# Altium PCB DiPho_AFE.PcbDoc (part 1 of 2)
Units mm, origin at the board's own origin, x right, y up, seen from the top; angles counter-clockwise.
Board outline 25.2 x 25.2 mm, 4 copper layers (Top Layer, Inner Layer 1, Inner Layer 2, Bottom Layer), stack 1.51 mm thick; 49 components, 32 nets, 163 pads, 94 vias.
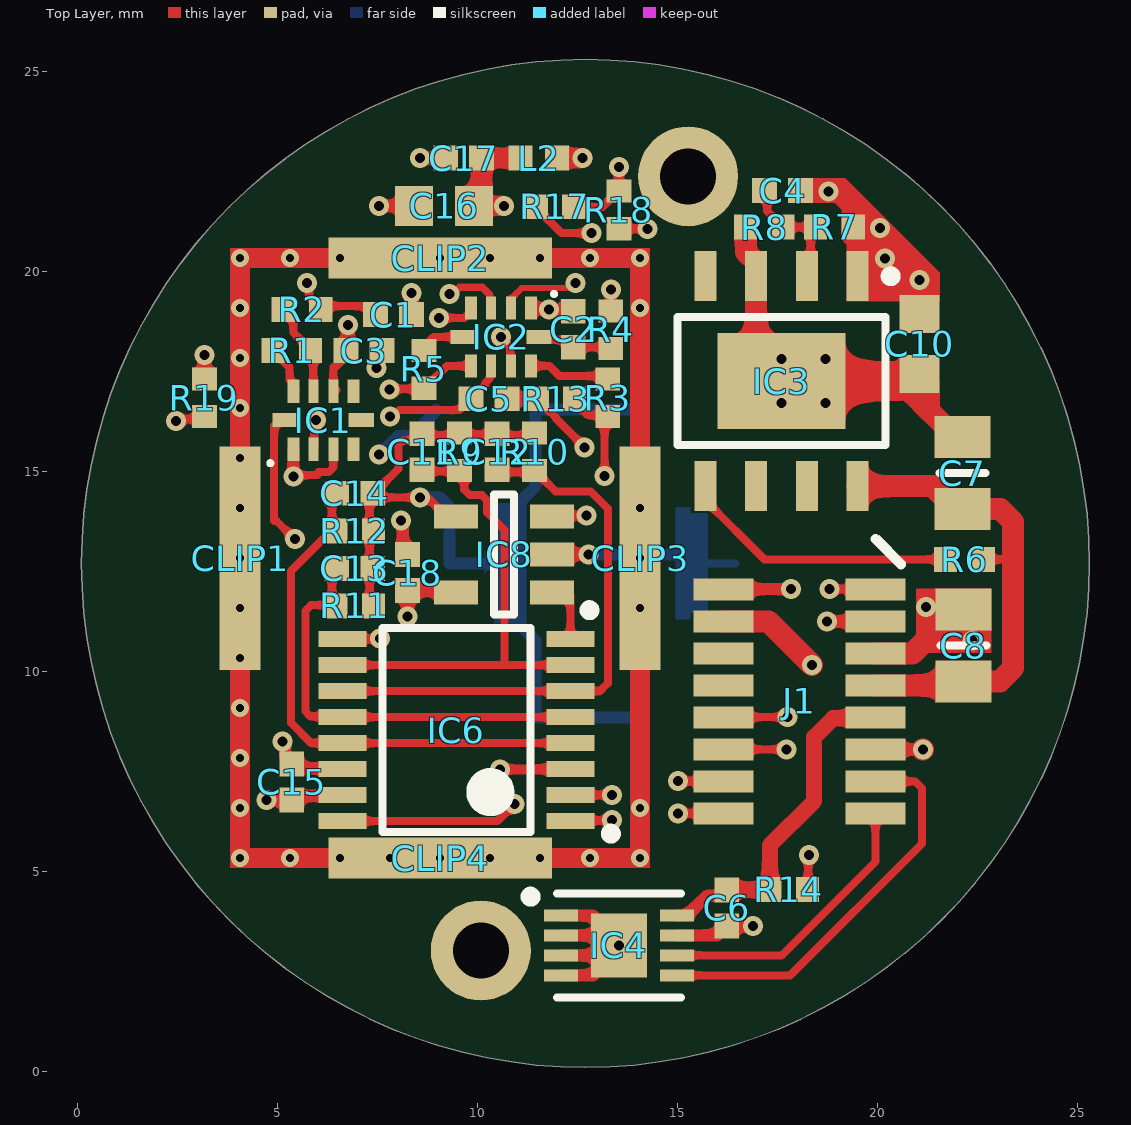
[diagram p0: Top Layer view]
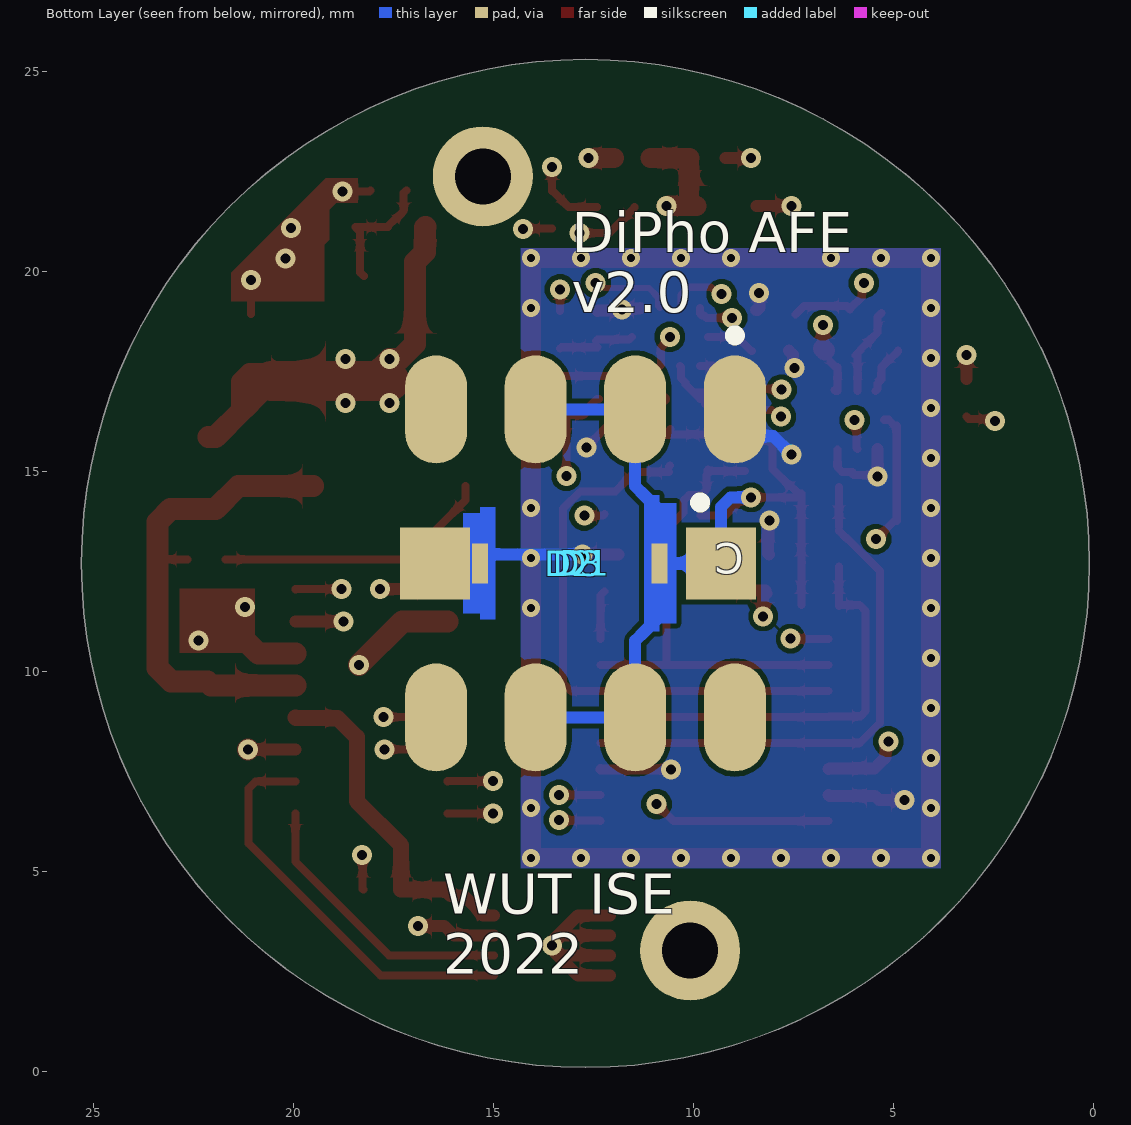
[diagram p1: Bottom Layer view, seen from below]
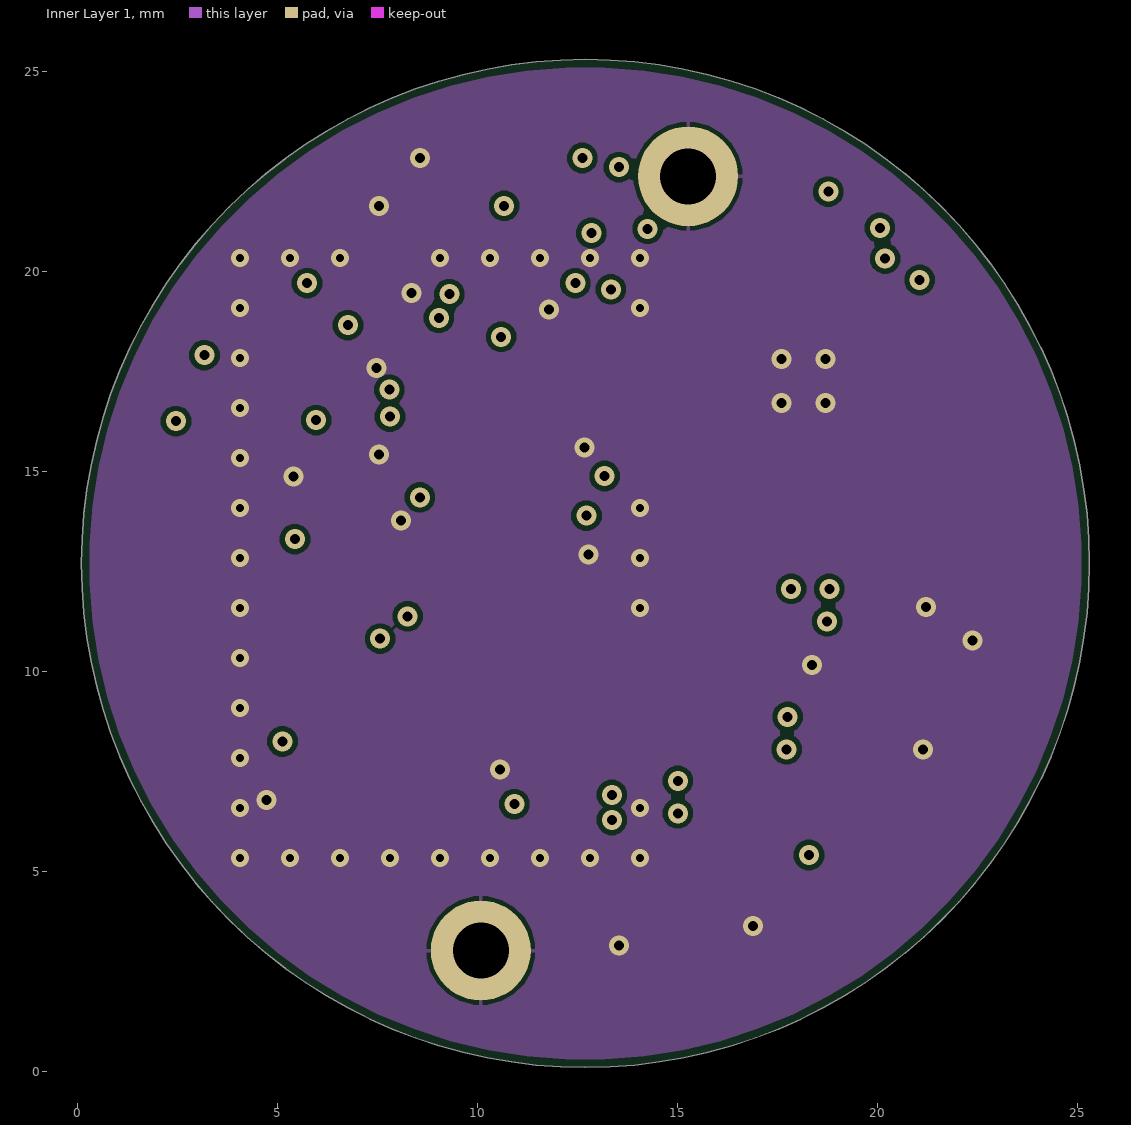
[diagram p2: Inner Layer 1]
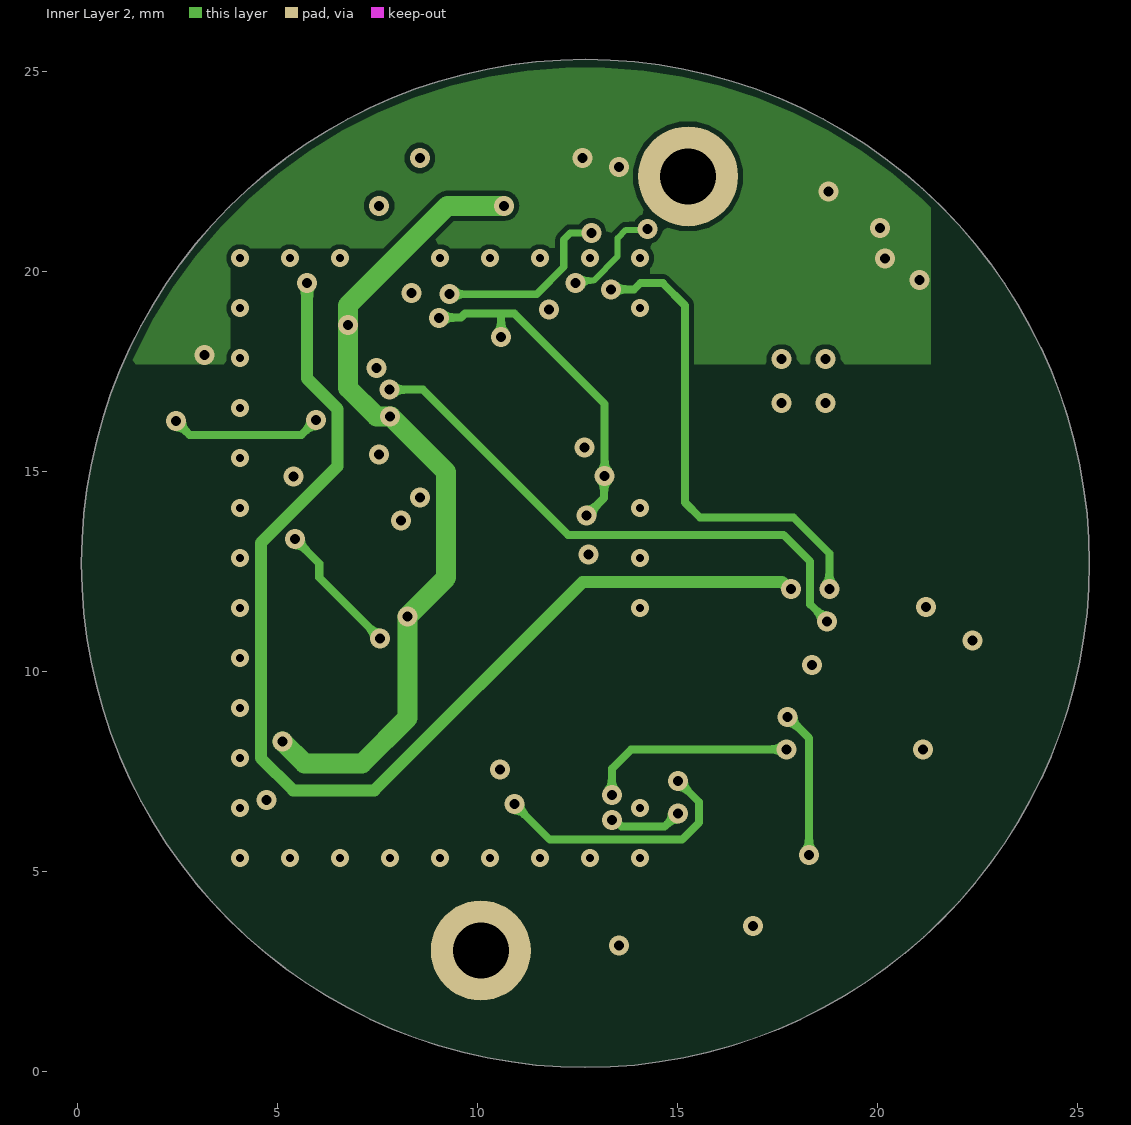
[diagram p3: Inner Layer 2]
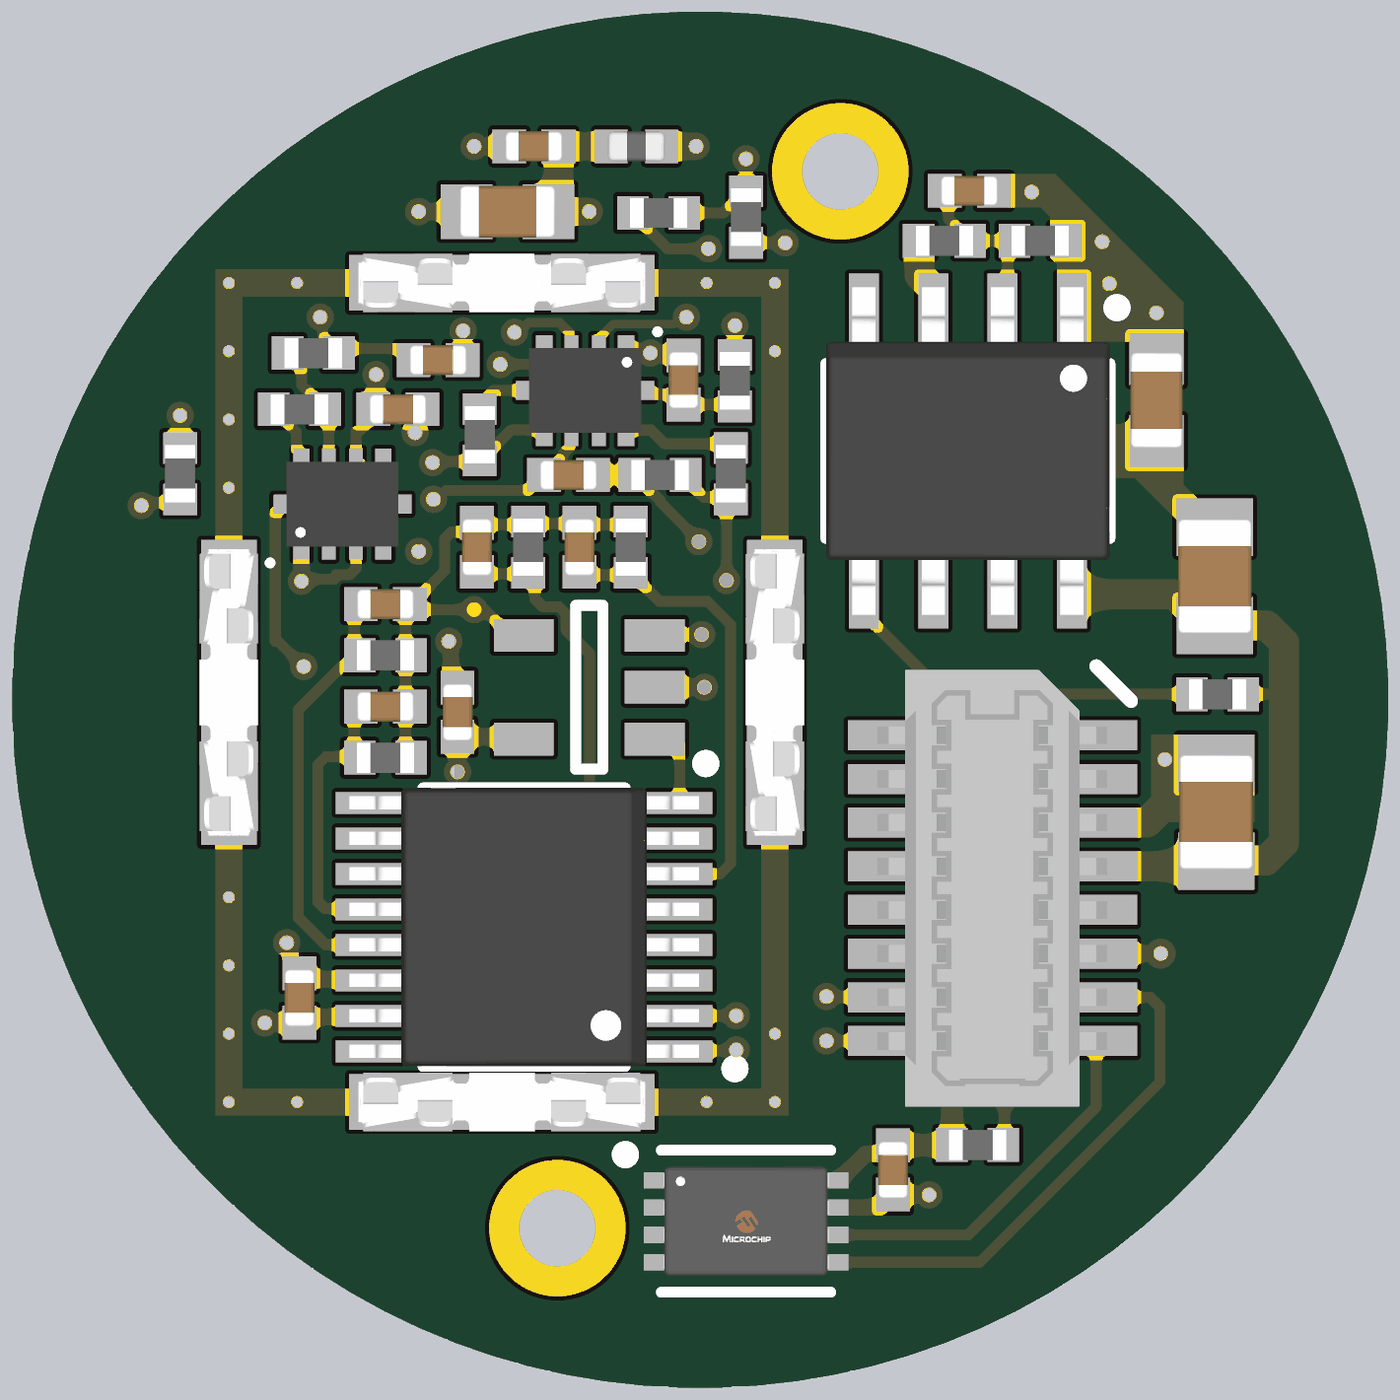
[diagram p4: 3D render of the assembled board from above, using the file's embedded part models]
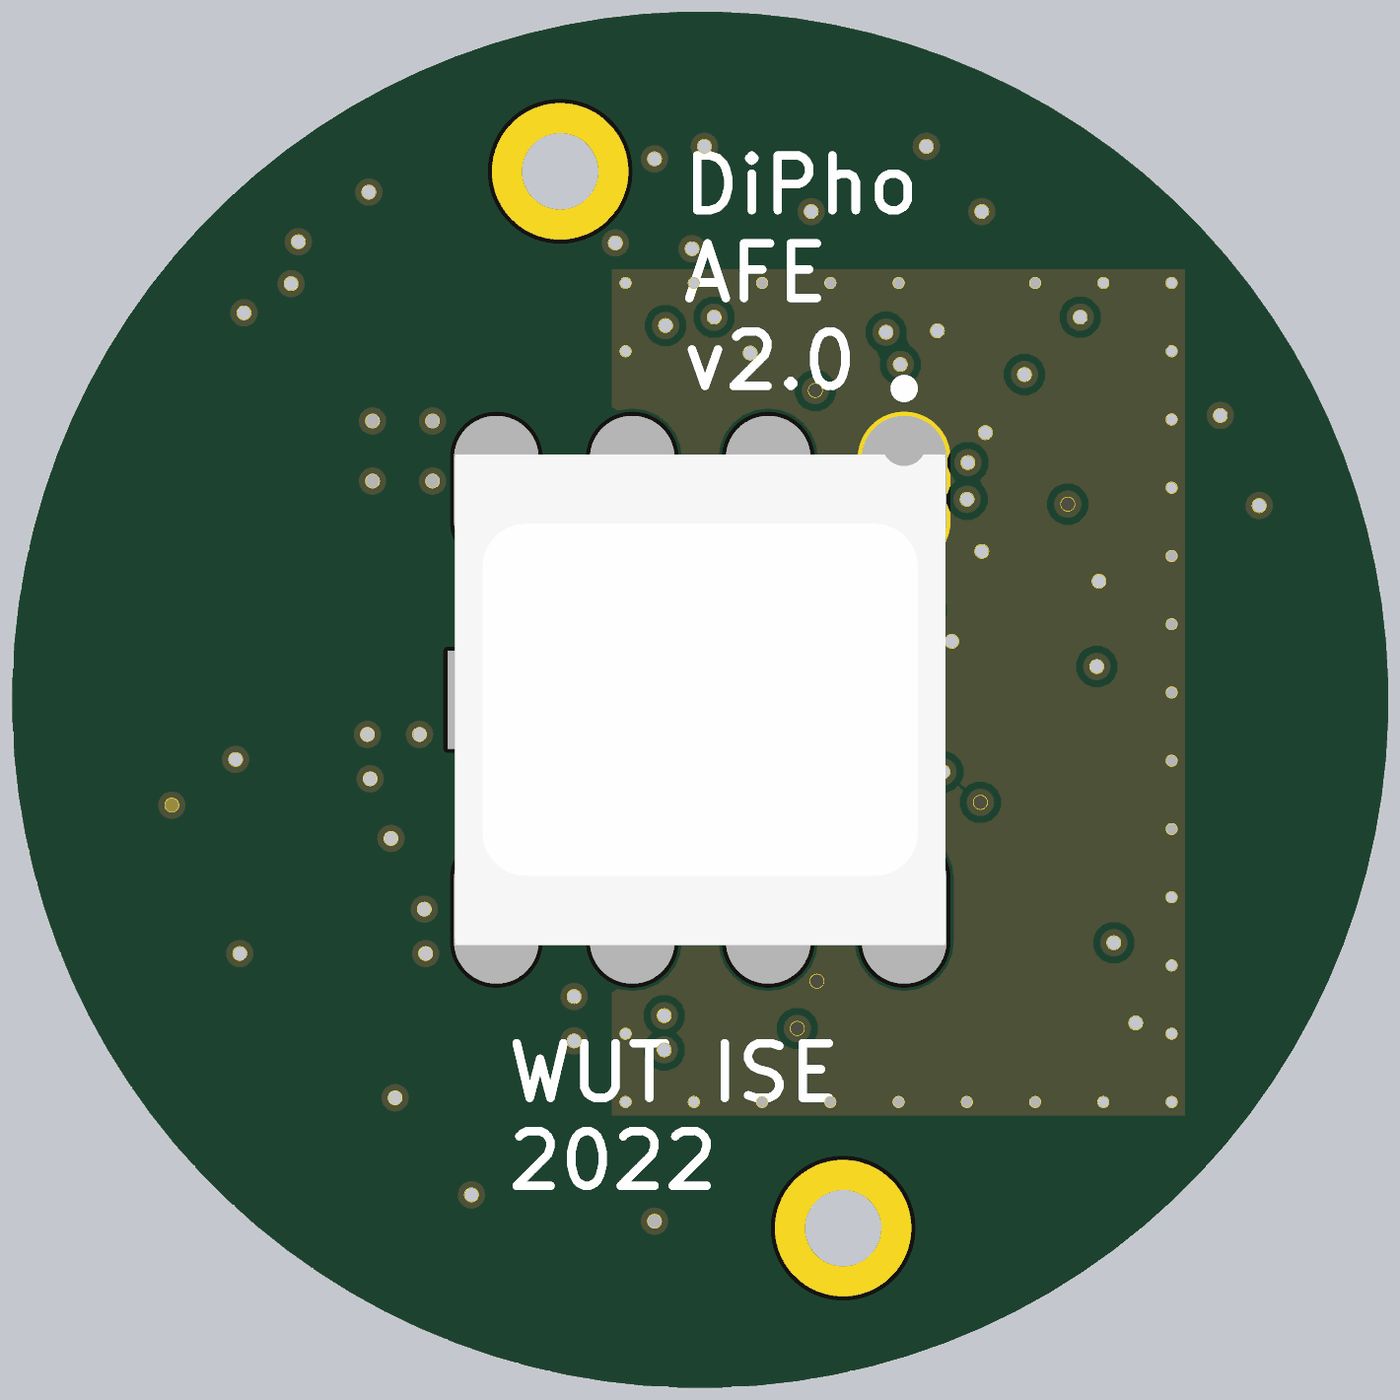
[diagram p5: 3D render of the assembled board from below, using the file's embedded part models]

## Layer stack, top to bottom
Top Solder: solder mask 0.0127, Solder Resist, Dk 3.8
Top Layer: signal copper 0.035
Dielectric 1: prepreg 0.22, PP-006, Dk 4.1
Inner Layer 1: signal copper 0.035
Dielectric: core 0.93, FR-4, Dk 4.5
Inner Layer 2: signal copper 0.035
Dielectric 2: prepreg 0.22, PP-006, Dk 4.1
Bottom Layer: signal copper 0.035
Bottom Solder: solder mask 0.0127, Solder Resist, Dk 3.8

## Board outline
12.7,0.1 cw(c12.7,12.7) 0.1,12.7 cw(c12.7,12.7) 12.7,25.3 cw(c12.7,12.7) 25.3,12.7 cw(c12.7,12.7)

## Design rules (kind name [scope] priority, off if disabled: settings)
AcuteAngle [All] p1: minimum=6.00000000000000E+0001 checktracksonly=FALSE
BoardOutlineClearance [All] p1: gap=0.2 ignorepadtopadclearanceinfootprint=FALSE
Clearance Clearance_ViaInPadThermal [IsPad and (InNet('NetC6_1') or InNet('GND') ) vs IsVia] p1: gap=0 ignorepadtopadclearanceinfootprint=TRUE except(-1: SMDPad-Via THPad-Via)
Clearance Clearance_ViaInPad [IsPad vs IsVia] p2: gap=0 ignorepadtopadclearanceinfootprint=TRUE except(0.001: SMDPad-Via THPad-Via)
Clearance [All] p3: gap=0.127 ignorepadtopadclearanceinfootprint=FALSE except(0.25: Arc-Hole Track-Hole SMDPad-Hole THPad-Hole Via-Hole Fill-Hole Poly-Hole Region-Hole Text-Hole)
ComponentClearance ComponentClearancePD [InComponent('D1') vs InComponent('D2')] p1: gap=-100 collisioncheckmode=3 verticalgap=-100 showdistances=FALSE
ComponentClearance [All] p2: gap=0.102 collisioncheckmode=3 verticalgap=0.102 showdistances=TRUE
DiffPairsRouting [All] p1: maxlimit=0.102 minlimit=0.102 mostfreqgap=0.102 toplayer_minwidth=0.102 toplayer_maxwidth=1816.048 toplayer_prefwidth=0.102 midlayer1_minwidth=0.102 midlayer1_maxwidth=1816.048 midlayer1_prefwidth=0.102 midlayer2_minwidth=0.102 midlayer2_maxwidth=1816.048 midlayer2_prefwidth=0.102 bottomlayer_minwidth=0.102 bottomlayer_maxwidth=1816.048 bottomlayer_prefwidth=0.102 maxuncoupledlength=12.7
Height [All] p1: minheight=0 maxheight=1816.048 prefheight=12.7
HoleSize [All] p1: absolutevalues=TRUE maxlimit=6.3 minlimit=0.2 maxpercent=80.000 minpercent=20.000
HoleToHoleClearance [All] p1: gap=0.25 allowstackedmicrovias=FALSE
MinimumAnnularRing [All] p1: minimumring=0.076
MinimumSolderMaskSliver [All] p1: minsoldermaskwidth=0
PlaneClearance [All] p1: clearance=0.102
PlaneConnect PlaneConnectPowerPads [InPadClass('PowerPads')] p1: planeconnectstyle=Direct reliefexpansion=0.508 reliefentries=4 reliefconductorwidth=0.254 reliefairgap=0.254
PlaneConnect [All] p2: pad.planeconnectstyle=Relief pad.reliefexpansion=0.3 pad.reliefentries=4 pad.reliefconductorwidth=0.102 pad.reliefairgap=0.102 via.planeconnectstyle=Direct via.reliefexpansion=0.3 via.reliefentries=4 via.reliefconductorwidth=0.127 via.reliefairgap=0.127
PolygonConnect PolygonConnectPowerPads [All vs (InPadClass('PowerPads'))] p1: connectstyle=Direct reliefconductorwidth=0.254 reliefentries=4 polygonreliefangle="90 Angle" airgapwidth=0.254
PolygonConnect [All] p2: thpad.connectstyle=Relief thpad.reliefconductorwidth=0.102 thpad.reliefentries=4 thpad.polygonreliefangle="90 Angle" thpad.airgapwidth=0.102 smdpad.connectstyle=Direct smdpad.reliefconductorwidth=0.102 smdpad.reliefentries=4 smdpad.polygonreliefangle="90 Angle" smdpad.airgapwidth=0.102 via.connectstyle=Direct via.reliefconductorwidth=0.127 via.reliefentries=4 via.polygonreliefangle="90 Angle" via.airgapwidth=0.127
RoutingVias [All] p1: holewidth=0.25 width=0.5 viastyle="Through Hole" minholewidth=0.25 minwidth=0.5 maxholewidth=6.3 maxwidth=6.55
SilkToSilkClearance [All] p1: silktosilkclearance=0
SilkToSolderMaskClearance [IsPad] p1: minsilkscreentomaskgap=0.001 clearancetoexposedcopper=TRUE
SolderMaskExpansion SolderMaskExpansionVia [IsVia] p1: expansion=0.075 istentingtop=TRUE
SolderMaskExpansion [All] p2: expansion=0.075 istentingtop=FALSE
Width [All] p1: maxlimit=1816.048 minlimit=0.13 preferedwidth=0.2 midlayer1_minwidth=0.15 midlayer2_minwidth=0.15 bottomlayer_minwidth=0.15 minimp=50.000000 maximp=50.000000 favimp=50.000000
20 further rules are at their usual default settings.

## Classes and differential pairs
component class "B2B Connector": J1 R14
component class "TI Amplifier": C11 C12 C13 C14 C15 C16 C17 C18 CLIP1 CLIP2 CLIP3 CLIP4 IC6 IC8 L2 R9 R10 R11 R12 R13
component class DiPho_AFE: C1 C2 C3 C4 C5 C6 C7 C8 C10 D1 D2 D3 IC1 IC2 IC3 IC4 R1 R2 R3 R4 R5 R6 R7 R8 R17 R18 R19

## Components (designator, comment, footprint, x,y, rotation, side; value= is the part's Value field where it differs from the comment)
C1 "10nF" CAPC1005X55N 7.899,18.923 r180 top
C2 "680nF" CAPC1005X55N 12.395,18.555 r270 top
C3 "100nF" CAPC1005X55N 7.163,18.022 r180 top
C4 "1nF" CAPC1005X55N 17.628,22.022 r0 top
C5 "100nF" CAPC1005X55N 10.287,16.815 r180 top
C6 "100nF" CAPC1005X55N 16.231,4.089 r90 top
C7 "10uF" CAPC2012X135N 22.123,14.961 r270 top
C8 "10uF" CAPC2012X135N 22.149,10.643 r270 top
C10 "4.7uF" CAPC1709X95N 21.057,18.186 r90 top
C11 "47nF" CAPC1005X55N 8.611,15.494 r270 top
C12 "4.7nF" CAPC1005X55N 10.49,15.494 r270 top
C13 "470pF" CAPC1005X55N 6.934,12.576 r180 top
C14 "47pF" CAPC1005X55N 6.934,14.453 r180 top
C15 "100nF" CAPC1005X55N 5.359,7.239 r90 top
C16 "4.7uF" CAPC1709X95N 9.169,21.641 r0 top
C17 "100nF" CAPC1005X55N 9.652,22.835 r0 top
C18 "100nF" CAPC1005X55N 8.255,12.471 r270 top
CLIP1 "Clip 1 Pin" MSBOX_HARWIN_S1721-46 4.067,12.833 r90 top
CLIP2 "Clip 1 Pin" MSBOX_HARWIN_S1721-46 9.067,20.333 r180 top
CLIP3 "Clip 1 Pin" MSBOX_HARWIN_S1721-46 14.067,12.833 r90 top
CLIP4 "Clip 1 Pin" MSBOX_HARWIN_S1721-46 9.067,5.333 r0 top
D1 "OPR5913" LCCS249P899X899X167-8N 12.7,12.7 r270 bottom locked
D2 "SFH2201" SFH_2201 13.09,12.7 r0 bottom locked
D3 "VBPW34S" SOT0P705X130-2M 12.88,12.7 r180 bottom locked
IC1 "TLV9002SIRUGR" QFN50P150X200X40-10N 6.147,16.281 r90 top
IC2 "TLV9002SIRUGR" QFN50P150X200X40-10N 10.592,18.364 r270 top
IC3 "BD00HC5WEFJ-E2" TSOP127P600X100_HS-9L 17.602,17.255 r270 top
IC4 "AT24MAC402-MAHM-T" FP-C04-21355-Q4B-MFG 13.538,3.15 r0 top
IC6 "MAX4639EUE+T" TSOP65P640X110-16L 9.473,8.534 r180 top
IC8 "AD8541ARTZ-REEL7" ADI-RJ-5_N 10.668,12.929 r180 top
J1 "52465-1671" 524651671 18.05,9.25 r0 top locked
L2 "600R@100MHz" INDC1005X55N 11.532,22.835 r180 top
R1 "10k" RESC1005X35N 5.359,18.022 r0 top
R2 "470" RESC1005X40N 5.613,19.05 r0 top
R3 "10k" RESC1005X35N 13.259,16.84 r270 top
R4 "470" RESC1005X40N 13.335,18.542 r270 top
R5 "1k" RESC1005X40N 8.661,17.551 r270 top
R6 "10k" RESC1005X40N 22.174,12.802 r180 top
R7 "10k2" RESC1005X40N 18.923,21.107 r0 top
R8 "2k2" RESC1005X40N 17.17,21.107 r180 top
R9 "324" RESC1005X40N 9.55,15.494 r270 top
R10 "3k24" RESC1005X40N 11.43,15.494 r270 top
R11 "32k4" RESC1005X40N 6.934,11.638 r180 top
R12 "324k" RESC1005X40N 6.934,13.515 r180 top
R13 "0" RESC1005X40N 11.963,16.815 r0 top
R14 "10k" RESC1005X40N 17.78,4.547 r180 top
R17 "10k" RESC1005X35N 11.938,21.615 r0 top
R18 "10k" RESC1005X35N 13.538,21.539 r90 top
R19 "10k" RESC1005X35N 3.175,16.84 r90 top

## Footprints (in the part's own frame and the unit in brackets; to place one, negate y for a bottom-side part, rotate by r counter-clockwise, add the part's x,y. Pads: shape width x height; smd on the part's side, far side on the other; paste and mask are expansions set on the pad)
524651671 [mm] "Molex Slim Stack, 0.80mm pitch, 20ckt"
  rect 1.5x0.55 smd: 1(-1.9,2.8) 2(-1.9,2) 3(-1.9,1.2) 4(-1.9,0.4) 5(-1.9,-0.4) 6(-1.9,-1.2) 7(-1.9,-2) 8(-1.9,-2.8) 9(1.9,-2.8) 10(1.9,-2) 11(1.9,-1.2) 12(1.9,-0.4) 13(1.9,0.4) 14(1.9,1.2) 15(1.9,2) 16(1.9,2.8)
  silkscreen extent 1.91,3.43 2.54,4.06, body extent -2.1,-4 2.1,4, height 3.56
ADI-RJ-5_N [mm] "SOT-23, 5-Leads, Body 2.9x1.6mm, Pitch 0.95mm, IPC Medium Density"
  rect 1.1x0.6 smd: 1(-1.2,0.95) 2(-1.2,0) 3(-1.2,-0.95) 4(1.2,-0.95) 5(1.2,0.95)
  silkscreen extent -2.26,-1.5 0.25,1.52, body extent -0.85,-1.5 0.85,1.5, height 1.45
CAPC1005X55N [mm] "Capacitor, Non-Polarized, Chip; 1.00mm L X 0.50mm W X 0.70mm H, IPC Medium Density"
  rect 0.62x0.62 smd: 1(-0.45,0) 2(0.45,0)
  body extent -0.52,-0.27 0.53,0.28, height 0.55
CAPC1709X95N [mm] "Capacitor, non-Polarized, Chip; 1.65mm L X 0.85mm W X 0.95mm H,IPC Medium Density"
  rect 0.95x1 smd: 1(-0.75,0) 2(0.75,0)
  body extent -0.87,-0.47 0.88,0.48, height 0.95
CAPC2012X135N [mm] "Chip Capacitor, Body 2.0x1.25mm, IPC Medium Density"
  rect 1.05x1.4 smd: 1(-0.9,0) 2(0.9,0)
  silkscreen extent 0,-0.58 0,0.58, body extent -1.05,-0.67 1.05,0.68, height 1.25
FP-C04-21355-Q4B-MFG [mm]
  rect 0.85x0.3 smd paste+0 mask+0: 1(-1.45,0.75) 2(-1.45,0.25) 3(-1.45,-0.25) 4(-1.45,-0.75) 5(1.45,-0.75) 6(1.45,-0.25) 7(1.45,0.25) 8(1.45,0.75)
  rect 1.4x1.6 smd paste+0 mask+0: 9(0,0)
  silkscreen extent -2.33,-1.3 1.55,1.34, body extent -1.97,-1.15 1.97,1.15, height 0.25
INDC1005X55N [mm] "Chip Inductor, 2-Leads, EIA 0402, Metric 1005, Body 1x0.5mm, 0402IPC Medium Density"
  rect 0.6x0.62 smd: 1(-0.46,0) 2(0.46,0)
  body extent -0.52,-0.27 0.53,0.28, height 0.55
LCCS249P899X899X167-8N [mm] "LCC, 8-Pins, Body 8,99x8,99mmx1,67mm, Pitch 2,49mm, IPC Medium Density"
  oval 2.7x1.55 smd: 1(-3.85,3.735) 2(-3.85,1.245) 3(-3.85,-1.245) 4(-3.85,-3.735) 5(3.85,-3.735) 6(3.85,-1.245) 7(3.85,1.245) 8(3.85,3.735)
  silkscreen extent -5.82,3.61 -5.58,3.86, body extent -4.5,-4.5 4.5,4.5, height 1.57
MSBOX_HARWIN_S1721-46 [mm] "RFI Shield Clip, Mini Size (5.08mm Long, 2.23mm High), For 0.13-0.23mm Shield Thickness."
  rect 5.59x1.02 smd: 1(0,0)
  body extent -2.62,-0.54 2.63,0.54, height 2.23
QFN50P150X200X40-10N [mm] "QFN, 10-Leads, Body 1,50x2,00mm, Pitch 0,50mm, IPC Medium Density"
  rect 0.58x0.3 smd: 1(-0.725,0.75) 4(-0.725,-0.75) 6(0.725,-0.75) 9(0.725,0.75)
  rect 0.58x0.25 smd: 2(-0.725,0.25) 3(-0.725,-0.25) 7(0.725,-0.25) 8(0.725,0.25)
  rect 0.35x0.63 smd: 5(0,-0.95) 10(0,0.95)
  silkscreen extent -1.12,1.28 -1.03,1.37, body extent -0.78,-1.03 0.78,1.03, height 0.4
RESC1005X35N [mm] "Chip Resistor, EIA 0402, Metric 1005, Body 1.0x0.5mm, IPC Medium Density"
  rect 0.58x0.62 smd: 1(-0.47,0) 2(0.47,0)
  body extent -0.52,-0.27 0.53,0.28, height 0.35
RESC1005X40N [mm] "Chip Resistor, EIA 0402, Metric 1005, Body 1.0x0.5mm, IPC Medium Density"
  rect 0.58x0.62 smd: 1(-0.47,0) 2(0.47,0)
  body extent -0.52,-0.27 0.53,0.28, height 0.4
SFH_2201 [mm]
  rect 0.4x1 smd paste-1 mask+0: A(2.24,0) C(-2.24,0)
  Top Layer region: 2.235,1.25 2.665,1.25 2.665,-1.25 2.235,-1.25 2.235,-1.4 1.865,-1.4 1.865,1.4 2.235,1.4
  Top Layer region: -1.865,-1.7 -2.235,-1.7 -2.235,-1.5 -2.665,-1.5 -2.665,0 -2.665,1.5 -2.235,1.5 -2.235,1.7 -1.865,1.7
  body extent -2.55,-2 2.54,2, height 0.85
SOT0P705X130-2M [mm] "SOT223, 2-Leads, Body 3,90x7,05mm (avg), Pitch 0,00mm, IPC Low Density"
  rect 1.75x1.8 smd: A(-3.575,0) C(3.575,0)
  silkscreen extent 2.92,1.4 3.17,1.65, body extent -3.52,-2 3.52,2, height 1.3
TSOP65P640X110-16L [mm] "TSOP, 16-Leads, Body 5,00x4,40mm, Pitch 0,65mm, IPC High Density"
  rect 1.2x0.4 smd: 1(-2.85,2.275) 2(-2.85,1.625) 3(-2.85,0.975) 4(-2.85,0.325) 5(-2.85,-0.325) 6(-2.85,-0.975) 7(-2.85,-1.625) 8(-2.85,-2.275) 9(2.85,-2.275) 10(2.85,-1.625) 11(2.85,-0.975) 12(2.85,-0.325) 13(2.85,0.325) 14(2.85,0.975) 15(2.85,1.625) 16(2.85,2.275)
  silkscreen extent -3.99,-2.55 1.85,2.72, body extent -3.2,-2.55 3.2,2.55, height 1.1
TSOP127P600X100_HS-9L [mm] "TSOP, 8-Leads, Body 5,00x3,90mm, Pitch 1,27mm, Thermal Pad 3,20x2,40mm, IPC High Density"
  rect 1.25x0.55 smd: 1(-2.625,1.905) 2(-2.625,0.635) 3(-2.625,-0.635) 4(-2.625,-1.905) 5(2.625,-1.905) 6(2.625,-0.635) 7(2.625,0.635) 8(2.625,1.905)
  rect 2.4x3.2 smd: TH(0,0)
  silkscreen extent -2.75,-2.6 1.6,2.86, body extent -3,-2.6 3,2.6, height 1

## Part data
C1: library part CC0402_10NF_16V_10%_X7R, "Non-polarised capacitor", Case=0402, Manufacturer=GENERIC, Manufacturer1 ComponentHeight=0.55mm, Manufacturer1 Example=PHYCOMP, Manufacturer1 Part Number=223878715636, Tolerance=±10%, Voltage=16V, Author="CERN DEM JLC", Component Type=Standard, CreateDate=03.12.2007, HelpURL=\\cern.ch\dfs\Applications\Altium\Datasheets\CC0402_X7R_PHYCOMP.pdf, LatestRevisionDate=03.12.2007, Manufacturer Part Number=CC0402_10NF_16V_10%_X7R, Mounted=Yes, Part Description="SMD Multilayer Chip Ceramic Capacitor", Part Number=CC0402_10NF_16V_10%_X7R, Pin Count=2, Sense=No, SMD=Yes, Socket=No, Status="Not Recommended", TC=X7R
C2: library part CC0402_680NF_10V_10%_X5R, "Non-polarised capacitor", Case=0402, Manufacturer=GENERIC, Manufacturer1 ComponentHeight=0.55mm, Manufacturer1 Example=MURATA, Manufacturer1 Part Number=GRM155R61A684KE15, Tolerance=±10%, Voltage=10V, Author="CERN DEM BC", Component Type=Standard, CreateDate=19.04.2021, HelpURL=\\cern.ch\dfs\Applications\Altium\Datasheets\CC0402_X5R_MURATA_GRM.pdf, LatestRevisionDate=19.04.2021, Manufacturer Part Number=CC0402_680NF_10V_10%_X5R, Mounted=Yes, Part Description="SMD Multilayer Chip Ceramic Capacitor", Part Number=CC0402_680NF_10V_10%_X5R, Pin Count=2, Sense=No, SMD=Yes, Socket=No, Status=None, TC=X5R
C3 C5 C6 C15 C17 C18: library part CC0402_100NF_16V_10%_X7R, "Non-polarised capacitor", Case=0402, Manufacturer=GENERIC, Manufacturer1 ComponentHeight=0.55mm, Manufacturer1 Example=MURATA, Manufacturer1 Part Number=GRM155R71C104KA88D, Tolerance=±10%, Voltage=16V, Author="CERN DEM JLC", Component Type=Standard, CreateDate=05.12.2013, HelpURL=\\cern.ch\dfs\Applications\Altium\Datasheets\CC0402_X7R_MURATA_GRM.pdf, LatestRevisionDate=03.12.2007, Manufacturer Part Number=CC0402_100NF_16V_10%_X7R, Mounted=Yes, Part Description="SMD Multilayer Chip Ceramic Capacitor", Part Number=CC0402_100NF_16V_10%_X7R, Pin Count=2, Sense=No, SMD=Yes, Socket=No, Status="Not Recommended", TC=X7R
C4: library part CC0402_1NF_50V_10%_X7R, "Non-polarised capacitor", Case=0402, Manufacturer=GENERIC, Manufacturer1 ComponentHeight=0.55mm, Manufacturer1 Example=PHYCOMP, Manufacturer1 Part Number=223858715623, Tolerance=±10%, Voltage=50V, Author="CERN DEM JLC", Component Type=Standard, CreateDate=03.12.2007, HelpURL=\\cern.ch\dfs\Applications\Altium\Datasheets\CC0402_X7R_PHYCOMP.pdf, LatestRevisionDate=03.12.2007, Manufacturer Part Number=CC0402_1NF_50V_10%_X7R, Mounted=Yes, Part Description="SMD Multilayer Chip Ceramic Capacitor", Part Number=CC0402_1NF_50V_10%_X7R, Pin Count=2, Sense=No, SMD=Yes, Socket=No, Status="Not Recommended", TC=X7R
C7 C8: library part CC0805_10UF_10V_10%_X7R, "Non-polarised capacitor", Case=0805, Manufacturer=GENERIC, Manufacturer1 ComponentHeight=1.35mm, Manufacturer1 Example=MURATA, Manufacturer1 Part Number=GRM21BR71A106KE51L, Tolerance=±10%, Voltage=10V, Author="CERN DEM JLC", Component Type=Standard, CreateDate=30.04.2012, HelpURL=\\cern.ch\dfs\Applications\Altium\Datasheets\CC0805_X7R_MURATA.pdf, LatestRevisionDate=30.04.2012, Manufacturer Part Number=CC0805_10UF_10V_10%_X7R, Mounted=Yes, Part Description="SMD Multilayer Chip Ceramic Capacitor", Part Number=CC0805_10UF_10V_10%_X7R, Pin Count=2, Sense=No, SMD=Yes, Socket=No, Status=Preferred, TC=X7R
C10 C16: library part CC0603_4.7UF_16V_10%_X5R, "Non-polarised capacitor", Case=0603, Manufacturer=GENERIC, Manufacturer1 ComponentHeight=0.95mm, Manufacturer1 Example="TAIYO YUDEN", Manufacturer1 Part Number=EMK107ABJ475KA-T, Tolerance=±10%, Voltage=16V, Author="CERN DEM JLC", Component Type=Standard, CreateDate=16.12.2013, HelpURL=\\cern.ch\dfs\Applications\Altium\Datasheets\CC0603_X7R_TAIYO-YUDEN_HIGH-VALUE.pdf, LatestRevisionDate=16.09.2014, Manufacturer Part Number=CC0603_4.7UF_16V_10%_X5R, Mounted=Yes, Part Description="SMD Multilayer Chip Ceramic Capacitor", Part Number=CC0603_4.7UF_16V_10%_X5R, Pin Count=2, Sense=No, SMD=Yes, Socket=No, Status=None, TC=X5R
C11: library part CC0402_47NF_25V_10%_X7R, "Non-polarised capacitor", Case=0402, Manufacturer=GENERIC, Manufacturer1 ComponentHeight=0.55mm, Manufacturer1 Example=TDK, Manufacturer1 Part Number=C1005X7R1E473K050, Tolerance=±10%, Voltage=25V, Author="CERN DEM JLC", Component Type=Standard, CreateDate=25.10.2012, HelpURL=\\cern.ch\dfs\Applications\Altium\Datasheets\CC0402_X7R_TDK_C.pdf, LatestRevisionDate=25.10.2012, Manufacturer Part Number=CC0402_47NF_25V_10%_X7R, Mounted=Yes, Part Description="SMD Multilayer Chip Ceramic Capacitor", Part Number=CC0402_47NF_25V_10%_X7R, Pin Count=2, Sense=No, SMD=Yes, Socket=No, Status=Preferred, TC=X7R
C12: library part CC0402_4.7NF_16V_10%_X7R, "Non-polarised capacitor", Case=0402, Manufacturer=GENERIC, Manufacturer1 ComponentHeight=0.55mm, Manufacturer1 Example=PHYCOMP, Manufacturer1 Part Number=223878715632, Tolerance=±10%, Voltage=16V, Author="CERN DEM JLC", Component Type=Standard, CreateDate=03.12.2007, HelpURL=\\cern.ch\dfs\Applications\Altium\Datasheets\CC0402_X7R_PHYCOMP.pdf, LatestRevisionDate=03.12.2007, Manufacturer Part Number=CC0402_4.7NF_16V_10%_X7R, Mounted=Yes, Part Description="SMD Multilayer Chip Ceramic Capacitor", Part Number=CC0402_4.7NF_16V_10%_X7R, Pin Count=2, Sense=No, SMD=Yes, Socket=No, Status="Not Recommended", TC=X7R
C13: library part CC0402_470PF_50V_10%_X7R, "Non-polarised capacitor", Case=0402, Manufacturer=GENERIC, Manufacturer1 ComponentHeight=0.55mm, Manufacturer1 Example=PHYCOMP, Manufacturer1 Part Number=223858715618, Tolerance=±10%, Voltage=50V, Author="CERN DEM JLC", Component Type=Standard, CreateDate=03.12.2007, HelpURL=\\cern.ch\dfs\Applications\Altium\Datasheets\CC0402_NP0_PHYCOMP.pdf, LatestRevisionDate=03.12.2007, Manufacturer Part Number=CC0402_470PF_50V_10%_X7R, Mounted=Yes, Part Description="SMD Multilayer Chip Ceramic Capacitor", Part Number=CC0402_470PF_50V_10%_X7R, Pin Count=2, Sense=No, SMD=Yes, Socket=No, Status="Not Recommended", TC=X7R
C14: library part CC0402_47PF_50V_5%_C0G, "Non-polarised capacitor", Case=0402, Manufacturer=GENERIC, Manufacturer1 ComponentHeight=0.55mm, Manufacturer1 Example=KEMET, Manufacturer1 Part Number=C0402C470J5GACTU, Tolerance=±5%, Voltage=50V, Author="CERN DEM JLC", Component Type=Standard, CreateDate=03.12.2007, HelpURL="\\cern.ch\dfs\Applications\Altium\Datasheets\CC0402_C0G_KEMET_(Commercial Grade).pdf", LatestRevisionDate=22.04.2015, Manufacturer Part Number=CC0402_47PF_50V_5%_C0G, Mounted=Yes, Part Description="SMD Multilayer Chip Ceramic Capacitor", Part Number=CC0402_47PF_50V_5%_C0G, Pin Count=2, Sense=No, SMD=Yes, Socket=No, Status=Preferred, TC=C0G/NP0
CLIP1 CLIP2 CLIP3 CLIP4: library part MSBOX_HARWIN_S1721-46, "Surface Mount Clip for PCB Screening Covers", Manufacturer=HARWIN, Manufacturer Part Number=S1721-46, Author="CERN DEM MR", Component Type=Standard, ComponentHeight=2.23mm, CreateDate=10.02.2016, HelpURL=\\cern.ch\dfs\Applications\Altium\Datasheets\HARWIN_S1721-46.pdf, LatestRevisionDate=10.02.2016, Mounted=Yes, PackageDescription="RFI Shield Clip, Mini Size (5.08mm Long, 2.23mm High), For 0.13-0.23mm Shield Thickness.", Part Description="RFI Shield Clip, Mini Size (5.08mm Long, 2.23mm High), For 0.13-0.23mm Shield Thickness.", Part Number=MSBOX_HARWIN_S1721-46, Pin Count=1, PressFit=No, Sense=No, SMD=Yes, Socket=No, Status=None
D1: "Surface mount PIN photodiode, SMD-8, RoHS", Case/Package=SMD/SMT, Dark Current=100nA, Manufacturer="TT Optek", Max Operating Temperature=125°C, Max Reverse Voltage (DC)=10V, Min Operating Temperature=-55°C, Package Quantity=25, Supplier Part Number 1=09AK6399, Category="Optical Sensors", ComponentLink1Description=https://datasheet.ciiva.com/2820/opr5910-5913-5915-2820071.pdf?src-supplier=Digi-Key, ComponentLink1URL=https://datasheet.ciiva.com/2820/opr5910-5913-5915-2820071.pdf?src-supplier=Digi-Key, Diode Type=PIN, Manufacturer Part Number=OPR5913, Mount="Surface Mount", Number of Pins=8, Packaging=Tray, Pricing 1="1=17,31000, 10=16,18000, 25=15,70000, 50=14,18000, 100=13,35000, 250=11,75000 (USD)", Responsivity=0.4A/W, Reverse Voltage=10V, RoHS=Yes, RoHS Compliant=Yes, Supplier 1=Newark, Wavelength=880nm
D3: "IR-photodiode Photoelectric current: 45...55 uA Wavelength of max. photosensitivity: 940 nm", Breakdown Voltage=60V, Case/Package=SMD/SMT, Dark Current=2nA, Forward Current=50mA, Forward Voltage=1.3V, Manufacturer=Vishay, Max Operating Temperature=100°C, Max Power Dissipation=215mW, Min Operating Temperature=-40°C, Package Quantity=1, Supplier Part Number 1=1779702, Category=Photodiodes, ComponentLink1Description=https://datasheet.ciiva.com/2819/vbpw34s-2819712.pdf?src-supplier=Digi-Key, ComponentLink1URL=https://datasheet.ciiva.com/2819/vbpw34s-2819712.pdf?src-supplier=Digi-Key, ComponentLink2Description=https://datasheet.ciiva.com/1336/485095-1336336.pdf?src-supplier=Newark, ComponentLink2URL=https://datasheet.ciiva.com/1336/485095-1336336.pdf?src-supplier=Newark, ComponentLink3Description=https://datasheet.ciiva.com/26941/getdatasheetpartid-402658-26941846.pdf?src-supplier=Verical, ComponentLink3URL=https://datasheet.ciiva.com/26941/getdatasheetpartid-402658-26941846.pdf?src-supplier=Verical, ComponentLink4Description=https://datasheet.ciiva.com/4697/vbpw34s-75683-4697656.pdf?src-supplier=Mouser, ComponentLink4URL=https://datasheet.ciiva.com/4697/vbpw34s-75683-4697656.pdf?src-supplier=Mouser, ComponentLink5Description=https://datasheet.ciiva.com/4270/2vbpw34s-4270116.pdf?src-supplier=Arrow+Electronics, ComponentLink5URL=https://datasheet.ciiva.com/4270/2vbpw34s-4270116.pdf?src-supplier=Arrow+Electronics, ComponentLink6Description=https://datasheet.ciiva.com/1249/vbpw34s-1249217.pdf?src-supplier=Element14, ComponentLink6URL=https://datasheet.ciiva.com/1249/vbpw34s-1249217.pdf?src-supplier=Element14, ComponentLink7Description=https://datasheet.ciiva.com/1249/485095-1249011.pdf?src-supplier=Element14, ComponentLink7URL=https://datasheet.ciiva.com/1249/485095-1249011.pdf?src-supplier=Element14, ComponentLink8Description=https://datasheet.ciiva.com/9218/vbpw34s-9218633.pdf?src-supplier=Avnet, ComponentLink8URL=https://datasheet.ciiva.com/9218/vbpw34s-9218633.pdf?src-supplier=Avnet, ComponentLink9Description=https://datasheet.ciiva.com/2819/vbpw34s-2819710.pdf?src-supplier=Digi-Key, ComponentLink9URL=https://datasheet.ciiva.com/2819/vbpw34s-2819710.pdf?src-supplier=Digi-Key, ComponentLink10Description=https://datasheet.ciiva.com/2819/vbpw34s-2819711.pdf?src-supplier=Digi-Key, ComponentLink10URL=https://datasheet.ciiva.com/2819/vbpw34s-2819711.pdf?src-supplier=Digi-Key, ComponentLink11Description=https://datasheet.ciiva.com/46390/1809628-46390726.pdf?src-supplier=Element14, ComponentLink11URL=https://datasheet.ciiva.com/46390/1809628-46390726.pdf?src-supplier=Element14, Contact Plating=Tin, Diode Type=PIN, Fall Time=100ns, Height=1.2mm, Lead Free="Lead Free", Length=4.4mm, Manufacturer Part Number=VBPW34S, Max Reverse Voltage (DC)=60V, Mount="Surface Mount,PCB", Number of Pins=2, Packaging="Tape and Reel", Power Dissipation=215mW, Radiation Hardening=No, REACH SVHC=Unknown, Response Time=100ns, Reverse Breakdown Voltage=60V, Reverse Voltage (DC)=60V, Rise Time=100ns, RoHS=Yes, RoHS Compliant=Yes, Series=-, Supplier 1=Farnell, Viewing Angle=130°, Wavelength=940nm, Width=3.9mm
IC1 IC2: "Rail-to-Rail Input/Output Operational Amplifier Dual 1.8V to 5.5V 10-Pin X2QFN T/R", Manufacturer="Texas Instruments", Supplier Part Number 1=296-TLV9002SIRUGRCT-ND, Category="Amplifiers - Op Amps, Buffer, Instrumentation", Manufacturer Part Number=TLV9002SIRUGR, Pricing 1="1=0,89000, 10=0,78400, 25=0,73600, 100=0,60070, 250=0,55800, 500=0,47488, 1000=0,37990 (USD)", RoHS=Yes, Stock 1=2771, Supplier 1=Digi-Key
IC3: "LDO Regulator Pos 0.8V to 4.5V 1.5A 8-Pin HTSOP-J EP T/R", Dropout Voltage=600mV, Manufacturer=Rohm, Max Input Voltage=8V, Max Operating Temperature=85°C, Max Output Current=1.5A, Max Output Voltage=7V, Max Power Dissipation=2.11W, Min Input Voltage=4.5V, Min Operating Temperature=-25°C, Min Output Voltage=1.5V, Package Quantity=1, Supplier Part Number 1=1780037, Category="Voltage Regulators - Linear", ComponentLink1Description=https://datasheet.ciiva.com/23909/1747247-23909522.pdf?src-supplier=Newark, ComponentLink1URL=https://datasheet.ciiva.com/23909/1747247-23909522.pdf?src-supplier=Newark, ComponentLink2Description=https://datasheet.ciiva.com/2040/bd00hc5wefj-e-2040163.pdf?src-supplier=Digi-Key, ComponentLink2URL=https://datasheet.ciiva.com/2040/bd00hc5wefj-e-2040163.pdf?src-supplier=Digi-Key, ComponentLink3Description=https://datasheet.ciiva.com/13009/bd00hc5wefj-e-210854-13009750.pdf?src-supplier=Mouser, ComponentLink3URL=https://datasheet.ciiva.com/13009/bd00hc5wefj-e-210854-13009750.pdf?src-supplier=Mouser, ComponentLink4Description=https://datasheet.ciiva.com/22732/1747247-22732891.pdf?src-supplier=Element14, ComponentLink4URL=https://datasheet.ciiva.com/22732/1747247-22732891.pdf?src-supplier=Element14, Contact Plating=Copper,Tin, Lead Free="Lead Free", Manufacturer Part Number=BD00HC5WEFJ-E2, Mount="Surface Mount", Number of Outputs=1, Number of Pins=8, Number of Regulators=1, Output Current=1.5A, Output Type=Adjustable, Output Voltage=7V, Packaging="Tape and Reel", REACH SVHC=Unknown, RoHS=Yes, RoHS Compliant=Yes, Series=-, Stock 1=2500, Supplier 1=RSComponents
IC4: library part CMP-06313-000089-1, "IC EEPROM 2K I2C 1MHZ 8UDFN", Frequency=1MHz, Max Operating Temperature=85°C, Min Operating Temperature=-40°C, Access Time=550ns, Memory Size=2Kb, Memory Type=Non-Volatile, Mount="Surface Mount", Packaging="Cut Tape", RoHS Compliant=Yes
IC6: "MAX4639 Series SP4T 2.5V 3.5 Ohm Surface Mount Analog Switch - TSSOP-16", Case/Package=TSSOP, Manufacturer=Maxim, Max Dual Supply Voltage=2.75V, Max Operating Temperature=85°C, Max Power Dissipation=457mW, Max Supply Voltage=5.5V, Min Dual Supply Voltage=900mV, Min Operating Temperature=-40°C, Min Supply Voltage=1.8V, On-State Resistance=3.5R, Operating Supply Current=1uA, Operating Supply Voltage=5V, Package Quantity=2500, Supplier Part Number 1=69AH0947, Bandwidth=85MHz, Category="Interface ICs", ComponentLink1Description=https://datasheet.ciiva.com/12185/max4638-max4639-64806-12185552.pdf?src-supplier=Mouser, ComponentLink1URL=https://datasheet.ciiva.com/12185/max4638-max4639-64806-12185552.pdf?src-supplier=Mouser, ComponentLink2Description=https://datasheet.ciiva.com/2979/max4638-max4639-2979809.pdf?src-supplier=Avnet, ComponentLink2URL=https://datasheet.ciiva.com/2979/max4638-max4639-2979809.pdf?src-supplier=Avnet, ComponentLink3Description=https://datasheet.ciiva.com/1685/max4638-max4639-1685689.pdf?src-supplier=Digi-Key, ComponentLink3URL=https://datasheet.ciiva.com/1685/max4638-max4639-1685689.pdf?src-supplier=Digi-Key, Logic Function=Multiplexer, Manufacturer Part Number=MAX4639EUE+T, Mount="Surface Mount", Number of Channels=2, Number of Pins=16, Number of Switches=2, Packaging="Tape and Reel", Pricing 1="1=6,47000, 10=5,85000, 25=5,58000, 50=5,22000, 100=4,85000, 250=4,63000, 500=4,22000, 1000=4,08000 (USD)", Propagation Delay=18ns, Radiation Hardening=No, RoHS=Yes, RoHS Compliant=Yes, Series=-, Stock 1=5520, Supplier 1=Newark, Supply Type=Single,Dual, Turn-Off Delay Time=9ns, Turn-On Delay Time=20ns
IC8: library part CMP-0384-01498-2, "Single Channel RRIO Operational Amplifier, 1 MHz BW, 920 mV/us SR, Industrial, 5-pin SOT23 (RJ-5), Reel", Amplifiers Per Package=1, Generic Part Number=AD8541, Input Bias Current=4pA, Input Offset Voltage=1mV, Manufacturer="Analog Devices", Code_JEDEC=MO-178-AA, ComponentLink1Description="Manufacturer URL", ComponentLink1URL=http://www.analog.com/en/index.html, ComponentLink2Description=Datasheet, ComponentLink2URL=http://www.analog.com/static/imported-files/data_sheets/AD8541_8542_8544.pdf, ComponentLink3Description="Package Specification", ComponentLink3URL=http://www.analog.com/static/imported-files/packages/PKG_PDF/SOT-23(RJ)/RJ_5.pdf, ComponentLink4Description="Reference Circuit", ComponentLink4URL=http://www.analog.com/en/all-operational-amplifiers-op-amps/operational-amplifiers-op-amps/ad8541/products/product.html#product-recommendations, DatasheetVersion="Rev. G", Iq/Amp=65uA, Mounting Technology="Surface Mount", PackageDescription="5-Pin Small Outline Transistor Package, Body 2.9 x 1.6 mm, Pitch 0.95 mm", PackageReference=RJ-5, PackageVersion=121608-A, PartNumber=AD8541ARTZ-REEL7, RevisionNote="Reference Circuit URL fixed", Slew Rate=920mV/us, Small Signal Bandwidth=1MHz, V Span Max=5.5V, V Span Min=2.7V
J1: "A Connector for Board - Board Connections with A 0.80 mm Pitch. (Molex)", Manufacturer=Molex, Supplier Part Number 1=3500606, Category="Headers and Wire Housings", ComponentLink1Description=https://datasheet.ciiva.com/5130/0524651671-pcb-receptacles-170554-5130522.pdf?src-supplier=Mouser, ComponentLink1URL=https://datasheet.ciiva.com/5130/0524651671-pcb-receptacles-170554-5130522.pdf?src-supplier=Mouser, ComponentLink2Description=https://datasheet.ciiva.com/10078/0524651671-pcb-receptacles-10078959.pdf?src-supplier=Avnet, ComponentLink2URL=https://datasheet.ciiva.com/10078/0524651671-pcb-receptacles-10078959.pdf?src-supplier=Avnet, Manufacturer Part Number=52465-1671, RoHS=Yes, Stock 1=1320, Supplier 1=Farnell
L2: library part IND0402_MURATA_BLM15HD601SN1, Case=0402, Manufacturer=MURATA, Manufacturer Part Number=BLM15HD601SN1D, Power=300mA, Resistance=0.85R, Tolerance=±25%, Author="CERN DEM JLC", Component Type=Standard, ComponentHeight=0.55mm, CreateDate=28.02.2012, HelpURL=\\cern.ch\dfs\Applications\Altium\Datasheets\IND0402_MURATA_BLM15H.pdf, LatestRevisionDate=25.10.2018, Mounted=Yes, Part Description="SMD EMIFIL Suppression Chip Ferrite Bead", Part Number=IND0402_MURATA_BLM15HD601SN1, Pin Count=2, Sense=No, SMD=Yes, Socket=No, Status=None
R1 R3 R17 R18 R19: library part R0402_10K_0.1%_0.063W_25PPM, "Resistor - 0.1%", Case=0402, Manufacturer=GENERIC, Manufacturer1 ComponentHeight=0.35mm, Manufacturer1 Example="TE CONNECTIVITY", Manufacturer1 Part Number=CPF0402B10KE1, Power=0.063W, Tolerance=±0.1%, Author="CERN DEM JMW", Component Type=Standard, CreateDate=22.09.2015, HelpURL=\\cern.ch\dfs\Applications\Altium\Datasheets\R0402_TYCO_CPF.pdf, LatestRevisionDate=22.09.2015, Manufacturer Part Number=R0402_10K_0.1%_0.063W_25PPM, Mounted=Yes, Part Description="Thin Film Precision Resistor", Part Number=R0402_10K_0.1%_0.063W_25PPM, Pin Count=2, PressFit=No, Sense=No, SMD=Yes, Socket=No, Status="Not Recommended", TC=±25ppm/°C
R2 R4: library part R0402_470R_1%_0.0625W_100PPM, "Resistor - 1%", Case=0402, Manufacturer=GENERIC, Manufacturer1 ComponentHeight=0.4mm, Manufacturer1 Example="YAGEO PHYCOMP", Manufacturer1 Part Number=232270674701L, Power=0.0625W, Tolerance=±1%, Author="CERN DEM JLC", Component Type=Standard, CreateDate=03.12.2007, HelpURL=\\cern.ch\dfs\Applications\Altium\Datasheets\R0402_Phycomp_RC0402.pdf, LatestRevisionDate=17.10.2012, Manufacturer Part Number=R0402_470R_1%_0.0625W_100PPM, Mounted=Yes, Part Description="General Purpose Thick Film Chip Resistor", Part Number=R0402_470R_1%_0.0625W_100PPM, Pin Count=2, PressFit=No, Sense=No, SMD=Yes, Socket=No, Status="Not Recommended", TC=±100ppm/°C
R5: library part R0402_1K_1%_0.0625W_100PPM, "Resistor - 1%", Case=0402, Manufacturer=GENERIC, Manufacturer1 ComponentHeight=0.4mm, Manufacturer1 Example="YAGEO PHYCOMP", Manufacturer1 Part Number=232270671002L, Power=0.0625W, Tolerance=±1%, Author="CERN DEM JLC", Component Type=Standard, CreateDate=03.12.2007, HelpURL=\\cern.ch\dfs\Applications\Altium\Datasheets\R0402_Phycomp_RC0402.pdf, LatestRevisionDate=17.10.2012, Manufacturer Part Number=R0402_1K_1%_0.0625W_100PPM, Mounted=Yes, Part Description="General Purpose Thick Film Chip Resistor", Part Number=R0402_1K_1%_0.0625W_100PPM, Pin Count=2, PressFit=No, Sense=No, SMD=Yes, Socket=No, Status="Not Recommended", TC=±100ppm/°C
R6 R14: library part R0402_10K_1%_0.0625W_100PPM, "Resistor - 1%", Case=0402, Manufacturer=GENERIC, Manufacturer1 ComponentHeight=0.4mm, Manufacturer1 Example="YAGEO PHYCOMP", Manufacturer1 Part Number=232270671003L, Power=0.0625W, Tolerance=±1%, Author="CERN DEM JLC", Component Type=Standard, CreateDate=03.12.2007, HelpURL=\\cern.ch\dfs\Applications\Altium\Datasheets\R0402_Phycomp_RC0402.pdf, LatestRevisionDate=17.10.2012, Manufacturer Part Number=R0402_10K_1%_0.0625W_100PPM, Mounted=Yes, Part Description="General Purpose Thick Film Chip Resistor", Part Number=R0402_10K_1%_0.0625W_100PPM, Pin Count=2, PressFit=No, Sense=No, SMD=Yes, Socket=No, Status="Not Recommended", TC=±100ppm/°C
R7: library part R0402_10K_1%_0.0625W_100PPM, "Resistor - 1%", Case=0402, Manufacturer=GENERIC, Manufacturer1 ComponentHeight=0.4mm, Manufacturer Part Number=R0402_10K2_1%_0.0625W_100PPM, Power=0.0625W, Tolerance=±1%, Author="CERN DEM JLC", Component Type=Standard, CreateDate=03.12.2007, HelpURL=\\cern.ch\dfs\Applications\Altium\Datasheets\R0402_Phycomp_RC0402.pdf, LatestRevisionDate=17.10.2012, Mounted=Yes, Part Description="General Purpose Thick Film Chip Resistor", Part Number=R0402_10K2_1%_0.0625W_100PPM, Pin Count=2, PressFit=No, Sense=No, SMD=Yes, Socket=No, Status="Not Recommended", TC=±100ppm/°C
R8: library part R0402_2K2_1%_0.0625W_100PPM, "Resistor - 1%", Case=0402, Manufacturer=GENERIC, Manufacturer1 ComponentHeight=0.4mm, Manufacturer1 Example="YAGEO PHYCOMP", Manufacturer1 Part Number=232270672202L, Power=0.0625W, Tolerance=±1%, Author="CERN DEM JLC", Component Type=Standard, CreateDate=03.12.2007, HelpURL=\\cern.ch\dfs\Applications\Altium\Datasheets\R0402_Phycomp_RC0402.pdf, LatestRevisionDate=17.10.2012, Manufacturer Part Number=R0402_2K2_1%_0.0625W_100PPM, Mounted=Yes, Part Description="General Purpose Thick Film Chip Resistor", Part Number=R0402_2K2_1%_0.0625W_100PPM, Pin Count=2, PressFit=No, Sense=No, SMD=Yes, Socket=No, Status="Not Recommended", TC=±100ppm/°C
R9: library part R0402_324R_1%_0.063W_100PPM, "Resistor - 0.1%", Case=0402, Manufacturer=GENERIC, Manufacturer1 ComponentHeight=0.4mm, Manufacturer Part Number=R0402_324R_0.1%_0.063W_100PPM, Power=0.063W, Tolerance=±0.1%, Author="CERN DEM BC", Component Type=Standard, CreateDate=10.01.2020, HelpURL="\\cern.ch\dfs\Applications\Altium\Datasheets\R0402_VISHAY_CRCW e3.pdf", LatestRevisionDate=10.01.2020, Mounted=Yes, Part Description="General Purpose Thick Film Chip Resistor", Part Number=R0402_324R_0.1%_0.063W_100PPM, Pin Count=2, PressFit=No, Sense=No, SMD=Yes, Socket=No, Status=None, TC=±100ppm/°C
R10: library part R0402_3K3_1%_0.0625W_100PPM, "Resistor - 0.1%", Case=0402, Manufacturer=GENERIC, Manufacturer1 ComponentHeight=0.4mm, Manufacturer Part Number=R0402_3K24_0.1%_0.0625W_100PPM, Power=0.0625W, Tolerance=±0.1%, Author="CERN DEM JLC", Component Type=Standard, CreateDate=03.12.2007, HelpURL=\\cern.ch\dfs\Applications\Altium\Datasheets\R0402_Phycomp_RC0402.pdf, LatestRevisionDate=17.10.2012, Mounted=Yes, Part Description="General Purpose Thick Film Chip Resistor", Part Number=R0402_3K24_0.1%_0.0625W_100PPM, Pin Count=2, PressFit=No, Sense=No, SMD=Yes, Socket=No, TC=±100ppm/°C
R11: library part R0402_33K2_0.1%_0.063W_25PPM, "Resistor - 0.1%", Case=0402, Manufacturer=GENERIC, Manufacturer1 ComponentHeight=0.4mm, Manufacturer Part Number=R0402_32K4_0.1%_0.063W_25PPM, Power=0.063W, Tolerance=±0.1%, Voltage=50V, Author="CERN DEM BC", Component Type=Standard, CreateDate=09.07.2020, HelpURL=\\cern.ch\dfs\Applications\Altium\Datasheets\R0402_PANASONIC_ERA.pdf, LatestRevisionDate=09.07.2020, Mounted=Yes, Part Description="Thin Film Precision Resistor", Part Number=R0402_32K4_0.1%_0.063W_25PPM, Pin Count=2, PressFit=No, Sense=No, SMD=Yes, Socket=No, TC=±25ppm/°C
R12: library part R0402_324K_1%_0.063W_100PPM, "Resistor - 0.1%", Case=0402, Manufacturer=GENERIC, Manufacturer1 ComponentHeight=0.4mm, Manufacturer Part Number=R0402_324K_0.1%_0.063W_100PPM, Power=0.063W, Tolerance=±0.1%, Author="CERN DEM BC", Component Type=Standard, CreateDate=24.01.2020, HelpURL="\\cern.ch\dfs\Applications\Altium\Datasheets\R0402_VISHAY_CRCW e3.pdf", LatestRevisionDate=24.01.2020, Mounted=Yes, Part Description="General Purpose Thick Film Chip Resistor", Part Number=R0402_324K_0.1%_0.063W_100PPM, Pin Count=2, PressFit=No, Sense=No, SMD=Yes, Socket=No, Status=None, TC=±100ppm/°C
R13: library part R0402_0R_JUMPER, "Resistor", Case=0402, Manufacturer=GENERIC, Manufacturer1 ComponentHeight=0.4mm, Manufacturer1 Example="YAGEO PHYCOMP", Manufacturer1 Part Number=232270591001L, Author="CERN DEM JLC", Component Type=Standard, CreateDate=03.12.2007, HelpURL=\\cern.ch\dfs\Applications\Altium\Datasheets\R0402_Phycomp_RC0402.pdf, LatestRevisionDate=17.10.2012, Manufacturer Part Number=R0402_0R_JUMPER, Mounted=Yes, Part Description="1A (0.05R Max DC Resistance) Zero Ohm Jumper", Part Number=R0402_0R_JUMPER, Pin Count=2, PressFit=No, Sense=No, SMD=Yes, Socket=No, Status="Not Recommended"

## Free pads (board coordinates)
  round 2.5 hole 1.4: 2(10.084,3.023) 2(15.265,22.377)

## Via types
v1: diameter 0.5, hole 0.25, Top Layer to Bottom Layer, tented both sides, 61 vias
v2: diameter 0.45, hole 0.2, Top Layer to Bottom Layer, tented both sides, 33 vias

## Nets (pads, with @x,y where several pads share a name; then routed paths per layer and width w, separated by ;. In a path a pad name is that pad's centre, name@x,y a point inside that pad or via, vN(x,y) a via of type N, cw(c..) or ccw(c..) an arc to the next point about the centre after c; other vN are vias at no path point)
AFE_TYPE_IND: J1.5 R14.1 | length 6.2
  Top Layer w0.203: J1.5 16.157,8.857 17.747,8.857 v1(17.755,8.865) ; R14.1 18.269,4.566 18.269,5.391 v1(18.288,5.41)
  Inner Layer 2 w0.203: v1(17.755,8.865) 18.288,8.331 v1(18.288,5.41)
DAC_TIA_OFFSET: C2.2 IC2.10 R4.2 | length 1.9
  Top Layer w0.203: IC2.10 11.611,18.295 12.395,18.295 C2.2@12.428,18.262 ; C2.2 13.302,18.105 R4.2
GND: C1.1 C2.1 C3.1 C5.1 C6.1 C7.1 C8.1 C10.1 C15.1 C16.1 C17.1 C18.1 CLIP1.1 CLIP2.1 CLIP3.1 CLIP4.1 D1.1 D2.A D3.A IC1.1 IC1.3 IC2.1 IC3.3 IC3.TH IC4.1 IC4.2 IC4.3 IC4.4 IC4.7 IC4.9 IC6.3 IC6.15 IC8.2 J1.2 J1.11 J1.14 pad.2 R8.2 R13.1 | length 48.4
  Top Layer w0.2: v1@5.433,14.907 5.947,14.907 ; v1@5.448,14.871 v1@5.484,14.907 ; 5.998,14.907 6.08,14.99 ; 6.029,14.99 6.282,14.99 6.399,15.107 IC1.3@6.399,15.554 ; R13.1 11.493,16.795 11.683,16.605 11.807,16.481 11.834,16.481 11.967,16.348 11.967,16.321 v1@12.675,15.614
  Top Layer w0.254: v1(10.563,7.546) 10.57,7.553 12.316,7.553 IC6.3
  Top Layer w0.3: v1(4.724,6.782) 4.728,6.785 5.356,6.785 5.461,6.89 6.604,6.89 IC6.15 ; v1(5.397,14.871) IC1.1 ; v1(7.477,17.592) 7.515,17.63 7.515,17.924 C3.1 ; v1(7.544,21.641) C16.1 ; v1(8.094,13.771) 8.132,13.733 8.132,12.951 C18.1@8.106,12.925 ; v1(8.357,19.456) 8.353,19.453 8.353,19.083 8.398,19.038 C1.1@8.437,19.038 ; v1(8.56,22.835) C17.1 ; C5.1 R13.1 ; IC2.1 11.342,19.07 11.766,19.07 v1(11.786,19.05) 11.808,19.027 12.373,19.027 C2.1 ; IC8.2 v1(12.776,12.929) ; IC4.4 12.888,2.4 13.538,3.05 v1(13.538,3.15) ; IC4.3 13.288,2.9 v1(13.538,3.15) ; IC4.2 13.288,3.4 v1(13.538,3.15) ; IC4.1 12.888,3.9 13.538,3.25 v1(13.538,3.15) ; IC4.7 15.991,3.4 C6.1 16.234,3.636 16.887,3.636 v1(16.891,3.632) ; J1.11 v1@21.131,8.05
  Top Layer w0.55: J1.2 17.274,11.25 v1(18.364,10.16) ; R8.2 16.715,21.092 16.715,20.482 16.967,20.23 IC3.3 16.967,18.18 17.342,17.805 v1(17.602,17.805) 17.971,17.436 C10.1 21.082,17.436 21.282,17.236 21.282,16.527 ; J1.14 20.877,10.45 21.72,11.293 21.899,11.293 C8.1 ; 20.554,17.255 21.282,16.527 ; v1@21.131,8.05 v1(21.133,8.052) ; C7.1 21.948,15.861 21.282,16.527
  Top Layer w1: IC3.TH 20.554,17.255
  Bottom Layer w0.2: D2.A D3.A
  Bottom Layer w0.3: v1(7.544,15.418) 8.007,15.881 8.341,15.881 8.965,16.505 D1.1 ; v1(12.776,12.929) 15.28,12.929 15.33,12.879 D2.A
  other v1: 22.377,10.77 21.209,11.608 12.675,15.596 17.602,16.705 18.702,16.705 18.702,17.805
  other v2: 4.067,5.333 5.317,5.333 6.567,5.333 7.817,5.333 9.067,5.333 10.317,5.333 11.567,5.333 12.817,5.333 14.067,5.333 4.067,6.583 14.067,6.583 4.067,7.833 4.067,9.083 4.067,10.333 4.067,11.583 14.067,11.583 4.067,12.833 14.067,12.833 4.067,14.083 14.067,14.083 4.067,15.333 4.067,16.583 4.067,17.833 4.067,19.083 14.067,19.083 4.067,20.333 5.317,20.333 6.567,20.333 9.067,20.333 10.317,20.333 11.567,20.333 12.817,20.333 14.067,20.333
LDO_FB: C4.1 IC3.2 R7.1 R8.1 | length 3.2
  Top Layer w0.2: C4.1 17.244,21.956 17.244,21.505 17.432,21.317 17.45,21.317 17.64,21.127 R8.1@17.64,21.109 ; R8.1 R7.1 18.331,20.986 18.331,19.975 IC3.2
NetC11_2: C11.2 IC6.7 IC6.10 R9.2 | length 12.2
  Top Layer w0.2: IC6.10 10.675,10.159 ; C11.2@8.712,15.006 R9.2@9.632,15.006 ; R9.2 9.668,14.906 9.668,14.551 9.814,14.406 10.112,14.406 10.245,14.273 10.245,13.975 10.675,13.544 10.675,10.159 ; R9.2@9.632,15.044 R9.2@9.652,15.024 ; IC6.7 10.675,10.159
NetC12_2: C12.2 IC6.6 IC6.11 R10.2 | length 14.2
  Top Layer w0.2: IC6.11 IC6.6 13.065,9.509 13.259,9.703 13.259,14.072 12.827,14.503 11.951,14.503 11.556,14.898 11.5,14.954 R10.2 ; C12.2@10.592,15.143 C12.2@10.612,15.123 ; C12.2@10.612,14.986 R10.2@11.43,14.986
NetC13_2: C13.2 IC6.5 IC6.12 R11.2 | length 10.9
  Top Layer w0.2: R11.2@6.363,11.64 C13.2@6.363,12.629 ; R11.2@6.363,11.66 5.844,11.66 5.696,11.513 5.696,9.006 5.826,8.876 6.607,8.876 IC6.12 IC6.5
NetC14_2: C14.2 IC6.4 IC6.13 R12.2 | length 13.4
  Top Layer w0.2: R12.2@6.363,13.536 6.363,13.516 6.173,13.326 6.153,13.326 5.336,12.51 5.336,8.715 5.84,8.211 6.622,8.211 IC6.13 IC6.4 ; R12.2@6.363,13.618 C14.2@6.363,14.607
NetIC1_2: IC1.2 R19.1 | length 5.3
  Top Layer w0.2: v1(2.464,16.256) 2.521,16.313 3.118,16.313 R19.1 ; IC1.2@5.9,15.56 5.922,15.581 5.922,16.234 v1(5.969,16.281)
  Inner Layer 2 w0.2: v1(2.464,16.256) 2.804,15.916 5.604,15.916 v1(5.969,16.281)
NetIC1_8: IC1.8 R1.2 R2.1 | length 2.2
  Top Layer w0.2: R2.1@5.296,18.961 5.4,18.858 5.4,18.469 5.637,18.232 5.639,18.232 5.829,18.042 R1.2 R1.2@5.948,17.903 ; IC1.8 R1.2@5.897,17.903
NetIC1_9: IC1.9 R1.1 | length 1.3
  Top Layer w0.2: R1.1 4.889,18.002 5.079,17.812 5.099,17.812 5.301,17.61 5.301,17.293 5.398,17.196 5.398,17.056 IC1.9@5.448,17.006
NetIC2_2: IC2.2 R18.1 | length 5.4
  Top Layer w0.152: IC2.2 10.891,19.138 10.891,19.365 11.108,19.582 12.228,19.582 12.352,19.706 v1(12.446,19.706)
  Top Layer w0.2: R18.1 14.252,21.069 v1(14.255,21.066)
  Inner Layer 2 w0.15: 13.78,21.04 14.229,21.04 v1(14.255,21.066)
  Inner Layer 2 w0.152: v1(12.446,19.706) 12.513,19.773 12.903,19.773 13.505,20.374 13.505,20.834 13.711,21.04 13.78,21.04
NetIC2_3: IC2.3 R17.1 | length 7.8
  Top Layer w0.18: v1(9.296,19.431) 9.383,19.431 9.558,19.606 10.12,19.606 10.307,19.42 10.307,19.124 IC2.3
  Top Layer w0.2: R17.1 11.468,21.595 12.103,20.96 v1(12.849,20.96)
  Inner Layer 2 w0.18: v1(9.296,19.431) 11.481,19.431 12.159,20.109 12.159,20.798 12.321,20.96 v1(12.849,20.96)
NetIC2_5: IC2.5 R5.1 | length 1.3
  Top Layer w0.2: R5.1@8.534,18.009 8.554,18.009 8.91,18.364 IC2.5
NetIC2_9: IC2.9 R3.1 | length 2
  Top Layer w0.203: IC2.9 11.799,17.639 12.052,17.386 R3.1@13.259,17.386
NetIC3_5: IC3.5 R6.2 | length 7
  Top Layer w0.2: IC3.5 15.697,14.28 17.176,12.802 R6.2
NetIC4_5: IC4.5 J1.10 | length 10.1
  Top Layer w0.2: IC4.5 17.817,2.4 21.118,5.701 21.118,7.076 20.944,7.25 J1.10
NetIC4_6: IC4.6 J1.9 | length 7.1
  Top Layer w0.2: IC4.6 17.606,2.9 19.95,5.243 J1.9
NetIC6_8: IC6.8 IC8.1 | length 1.2
  Top Layer w0.2: IC8.1@12.224,12.004 12.323,11.905 IC6.8
NetJ1_16: J1.16 R4.1 | length 13.8
  Top Layer w0.2: R4.1 v1(13.335,19.553) ; v1(18.796,12.065) 18.804,12.057 19.943,12.057 J1.16
  Inner Layer 2 w0.2: v1(13.335,19.553) 13.92,19.553 14.073,19.706 14.635,19.706 15.189,19.152 15.189,14.224 15.57,13.843 17.907,13.843 18.796,12.954 v1(18.796,12.065)
P3V3: C6.2 IC4.8 J1.12 R14.2 | length 8.6
  Top Layer w0.3: IC4.8 15.263,3.9 15.286,3.923 15.286,3.942 15.732,4.387 16.079,4.387 C6.2
  Top Layer w0.4: C6.2 16.234,4.543 17.306,4.543 R14.2 17.31,5.651 18.415,6.756 18.415,8.357 18.892,8.834 19.934,8.834 J1.12
P4V5: C4.2 C10.2 IC3.1 L2.1 R7.2 R17.2 R18.2 R19.2 | length 6.4
  Top Layer w0.2: R17.2 13.124,21.615 13.518,22.009 R18.2 v1(13.538,22.606) ; C4.2 18.103,21.996 v1(18.771,21.996) ; R7.2 19.412,21.088 v1(20.061,21.088) ; IC3.1 19.507,20.145 19.682,20.32 v1(20.193,20.32) ; C10.2 v1(21.057,19.787)
  Top Layer w0.3: R19.2 v1(3.175,17.907)
  Top Layer w0.5: L2.1 v1(12.624,22.835)
P5V0: C7.2 C8.2 IC3.8 J1.13 R6.1 | length 12.3
  Top Layer w0.2: R6.1 23.343,12.802 23.393,12.852
  Top Layer w0.55: IC3.8 21.379,14.63 21.948,14.061 C7.2 23.071,14.061 23.393,13.738 23.393,12.852 23.393,10.084 23.063,9.754 22.16,9.754 C8.2 22.056,9.65 J1.13
PA4V5: C3.2 C5.2 C15.2 C16.2 C17.2 C18.2 IC1.7 IC2.7 IC6.14 IC8.5 L2.2 | length 32.7
  Top Layer w0.2: IC1.7 6.397,17.616 ; IC1.7@6.448,17.006 IC1.7@6.473,17.031 ; 6.448,17.616 C3.2@6.579,17.747 ; 8.054,16.531 9.553,16.531 9.713,16.691 9.713,16.938 C5.2 ; C5.2@9.682,16.97 C5.2@9.837,16.97 ; IC2.7 10.317,17.614 10.317,17.336 10.2,17.219 10.2,17.178 C5.2@9.992,16.97 ; C5.2 C5.2@9.992,16.97 ; C5.2 C5.2@9.837,16.97 ; C5.2@9.837,16.97 C5.2@9.992,16.97
  Top Layer w0.3: v1(5.126,8.25) 5.126,8.196 5.199,8.123 5.199,7.849 C15.2 5.47,7.579 6.604,7.579 IC6.14 ; C3.2@6.762,18.071 v1(6.762,18.656) ; C18.2@8.179,11.945 8.255,11.869 v1(8.255,11.379) ; C18.2@8.204,12.021 C18.2 IC8.5@9.425,12.021 ; IC8.5@9.501,12.047 IC8.5@9.544,12.004 ; IC8.5@9.802,12.025 IC8.5@9.824,12.004
  Top Layer w0.5: C3.2 C3.2@6.762,18.071 ; C16.2 C16.2@9.969,21.641 ; v1(10.668,21.641) C16.2@9.969,21.641 ; L2.2 C17.2 10.109,22.827 10.109,21.781 C16.2@9.969,21.641
  Inner Layer 2 w0.5: v1(5.126,8.25) 5.68,7.696 7.112,7.696 8.255,8.839 v1(8.255,11.379) 9.22,12.344 9.22,14.986 7.835,16.371 7.48,16.371 6.762,17.088 6.762,19.153 9.25,21.641 v1(10.668,21.641)
  other v1: 7.813,16.371
PD_CATHODE: C11.1 C12.1 C13.1 C14.1 D1.2 D1.3 D1.6 D1.7 D2.C D3.C IC8.4 R9.1 R10.1 R11.1 R12.1 | length 27.5
  Top Layer w0.2: C13.1@7.283,12.727 C13.1@7.303,12.747 ; R11.1@7.303,11.66 C13.1@7.303,12.629 ; C13.1@7.303,12.669 C13.1@7.303,12.747 ; C14.1@7.414,14.455 7.414,14.483 7.594,14.663 7.622,14.663 8.021,15.062 8.021,15.655 8.138,15.772 8.439,15.772 C11.1 ; C11.1@8.763,15.906 R9.1@9.632,15.906 ; R9.1@9.632,16.043 R9.1@9.652,16.063 ; R9.1@9.652,15.926 C12.1@10.572,15.926 ; IC8.4@9.824,13.904 9.193,13.904 8.803,14.294 8.617,14.294 v1(8.56,14.351) 7.406,14.351 7.358,14.399 7.303,14.455 7.303,13.515 C13.1@7.303,12.747 ; C12.1@10.572,16.063 C12.1@10.592,16.043 ; C12.1@10.592,15.906 R10.1@11.512,15.906 ; R10.1@11.512,16.043 R10.1@11.532,16.063
  Bottom Layer w0.3: v1(8.56,14.351) 9.068,14.351 9.305,14.114 D3.C D2.C ; D1.6 D1.7 11.455,10.77 11.225,11 10.85,11.375 D2.C ; D1.3 D1.2 11.455,14.63 11.225,14.4 10.85,14.025 D2.C
SEN_SIGNAL: C1.2 J1.1 R2.2 | length 32.9
  Top Layer w0.2: v1(5.74,19.706) v1@5.786,19.66 ; v1@5.74,19.736 5.789,19.687 5.789,19.364 6.083,19.07 R2.2 6.166,19.133 7.239,19.133 C1.2 ; J1.1 J1.1@16.158,12.057
  Top Layer w0.3: J1.1@16.158,12.057 17.835,12.057 v1(17.842,12.065)
  Inner Layer 2 w0.3: v1(5.74,19.706) 5.74,17.323 6.502,16.561 6.502,15.126 4.587,13.211 4.587,7.833 5.392,7.029 7.423,7.029 12.63,12.236 17.617,12.236 17.788,12.065 v1(17.842,12.065)
TIA_GAIN_SEL_A: IC6.16 J1.7 | length 12
  Top Layer w0.2: IC6.16 10.501,6.259 v1(10.922,6.68) ; v1(15.011,7.264) 15.019,7.257 16.143,7.257 J1.7
  Inner Layer 2 w0.2: v1(10.922,6.68) 11.808,5.794 15.116,5.794 15.545,6.223 15.545,6.731 v1(15.011,7.264)
TIA_GAIN_SEL_B: IC6.1 J1.8 | length 4
  Top Layer w0.2: IC6.1 12.337,6.273 13.346,6.273 v1(13.36,6.287) ; v1(15.011,6.452) J1.8@16.149,6.451
  Inner Layer 2 w0.2: v1(13.36,6.287) 13.442,6.287 13.608,6.121 14.681,6.121 v1(15.011,6.452)
TIA_GAIN_SEL_EN: IC6.2 J1.6 | length 7.8
  Top Layer w0.2: IC6.2 12.326,6.912 13.358,6.912 v1(13.36,6.914) ; v1(17.729,8.052) v1(17.729,8.052) J1.6@16.151,8.051 ; J1.6 J1.6@16.151,8.051
  Inner Layer 2 w0.2: v1(13.36,6.914) 13.36,7.569 13.843,8.052 v1(17.729,8.052)
TIA_OFFSET: IC2.4 IC2.8 IC8.3 R3.2 R13.2 | length 13.7
  Top Layer w0.2: v1(9.036,18.841) 9.675,18.841 9.733,18.899 9.792,18.899 9.842,18.949 IC2.4 ; v1(10.592,18.364) 10.592,18.322 10.817,18.097 10.817,17.664 IC2.8 ; IC8.3@12.224,13.933 12.263,13.894 v1(12.725,13.894) ; R13.2@12.357,16.815 12.413,16.815 12.623,16.605 12.623,16.549 12.766,16.406 13.223,16.406 R3.2 ; v1(13.18,14.884) R3.2@13.18,16.387
  Inner Layer 2 w0.2: v1(9.036,18.841) 9.044,18.848 9.586,18.848 9.686,18.948 10.592,18.948 ; v1(10.592,18.364) 10.592,18.948 ; v1(12.725,13.894) 13.166,14.334 13.166,14.842 v1@13.208,14.884 ; v1(13.18,14.884) 13.18,16.691 10.922,18.948 10.592,18.948
TIA_OFFSET_MEAS: IC2.6 J1.15 R5.2 | length 17.5
  Top Layer w0.2: v1(7.798,17.043) 7.817,17.062 8.642,17.062 R5.2@8.649,17.069 ; R5.2 R5.2@8.649,17.069 ; IC2.6 9.239,17.639 8.669,17.069 R5.2@8.649,17.069
  Top Layer w0.3: v1(18.745,11.252) v1(18.745,11.252) 19.949,11.251 J1.15
  Inner Layer 2 w0.2: v1(7.798,17.043) 8.636,17.043 12.264,13.415 17.649,13.415 18.319,12.745 18.319,11.678 v1(18.745,11.252)
TIA_OUTPUT: IC1.10 IC6.9 | length 7.7
  Top Layer w0.203: 4.918,13.768 IC1.10@4.918,16.143 ; 4.969,13.768 5.429,13.309 v1(5.437,13.309) ; IC1.10@4.969,16.143 5.118,16.292 IC1.10@5.237,16.292 ; IC6.9 6.629,10.815 7.564,10.815 v1(7.569,10.82)
  Inner Layer 2 w0.203: v1(5.437,13.309) 6.045,12.701 6.045,12.344 v1(7.569,10.82)
pads on no net: D1.4 D1.5 D1.8 IC1.4 IC1.5 IC1.6 IC3.4 IC3.6 IC3.7 J1.3 J1.4

## Polygon pours and split planes (outlines as drawn)
GND on Inner Layer 1 "PA3V3_L01_P-001" (solid, pour order 8): 0,0.063 0,25.337 25.298,25.337 25.298,0.063
GND on Bottom Layer "GND" (solid, pour order 9): 3.817,20.583 3.817,5.084 14.317,5.084 14.317,20.583
P4V5 on Inner Layer 2 "P4V5_L03_P010" (solid, pour order 10): -1.27,18.999 0.053,17.676 21.336,17.676 21.336,23.317 12.192,32.461

## Other copper
Top Layer:
  rectangle net GND: 20.959,10.458 22.849,12.068